# Altium PCB PCB1.PcbDoc
Units mil, origin at the board's own origin, x right, y up, seen from the top; angles counter-clockwise.
Board outline 3000 x 1000 mil, 4 copper layers (Component Side, Ground Plane, Power Plane, Solder Side), stack 33.234 mil thick; 113 components, 85 nets, 469 pads, 176 vias.
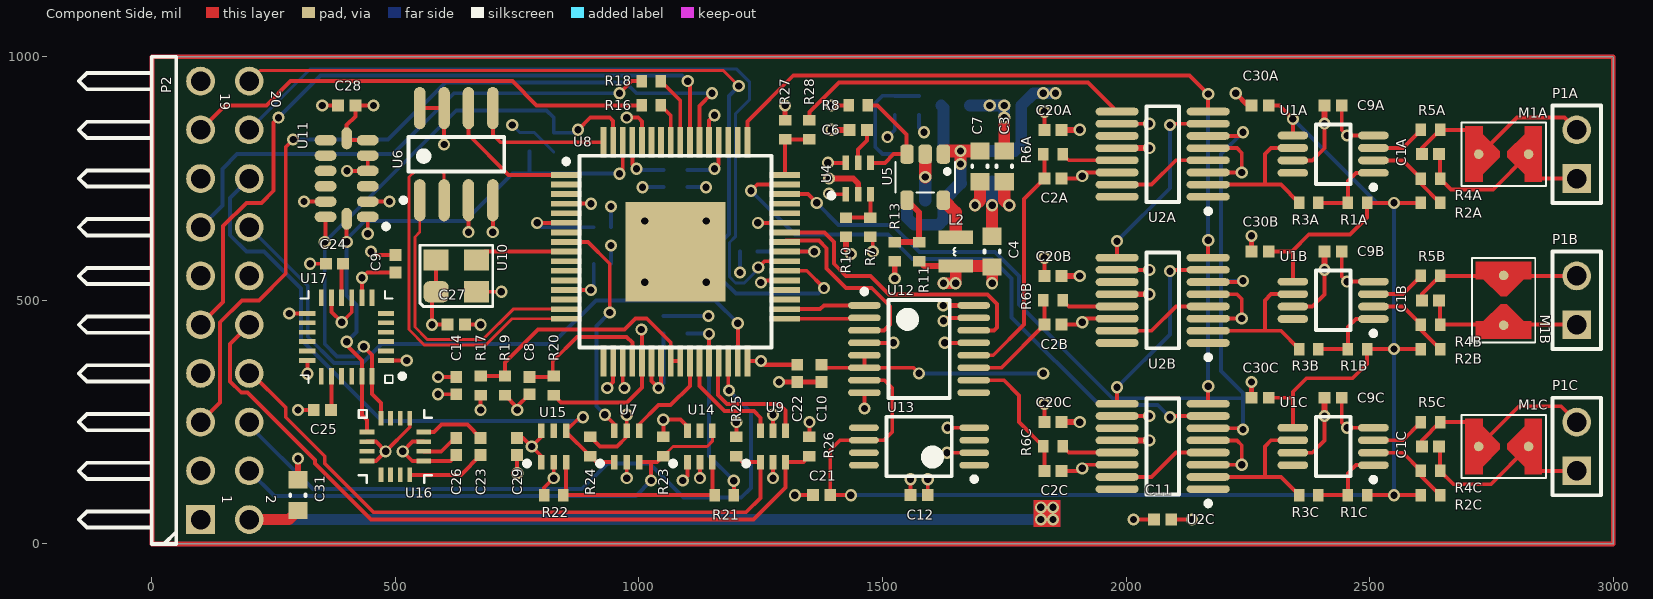
[diagram p0: Component Side view]
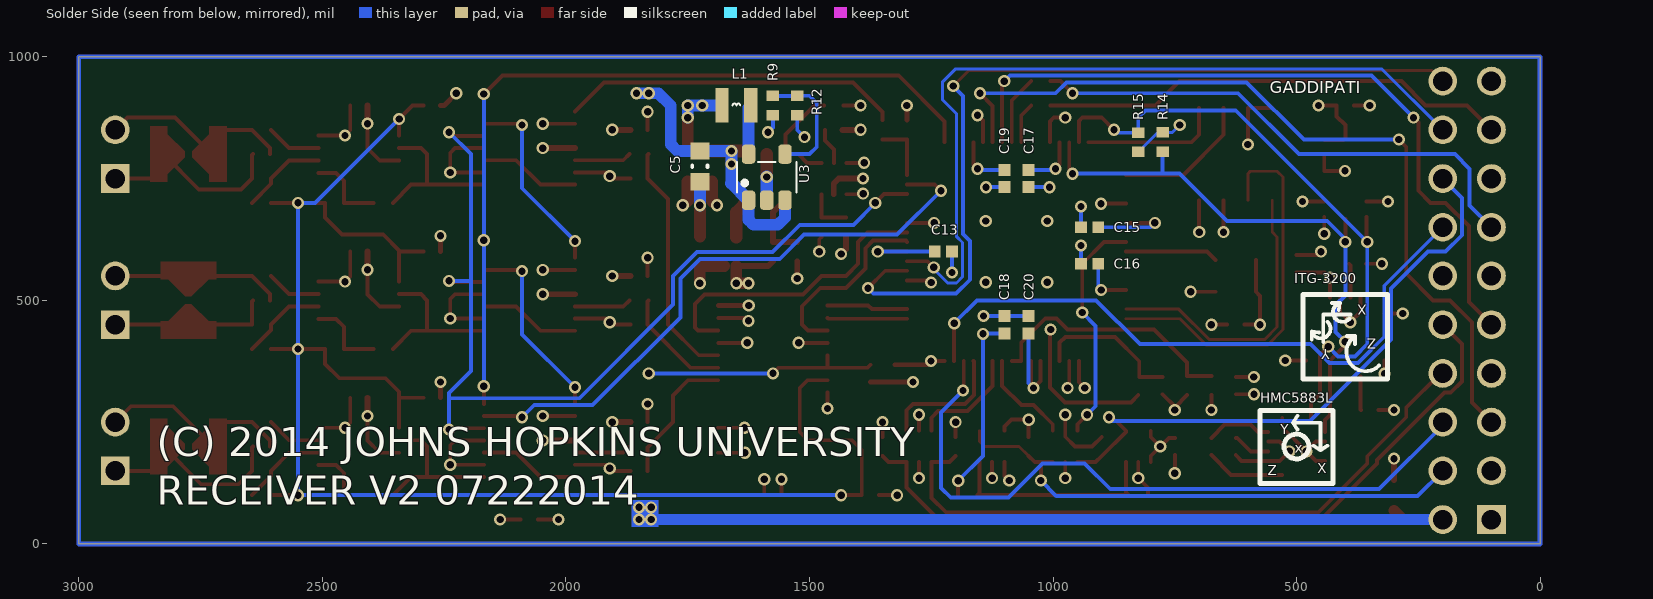
[diagram p1: Solder Side view, seen from below]
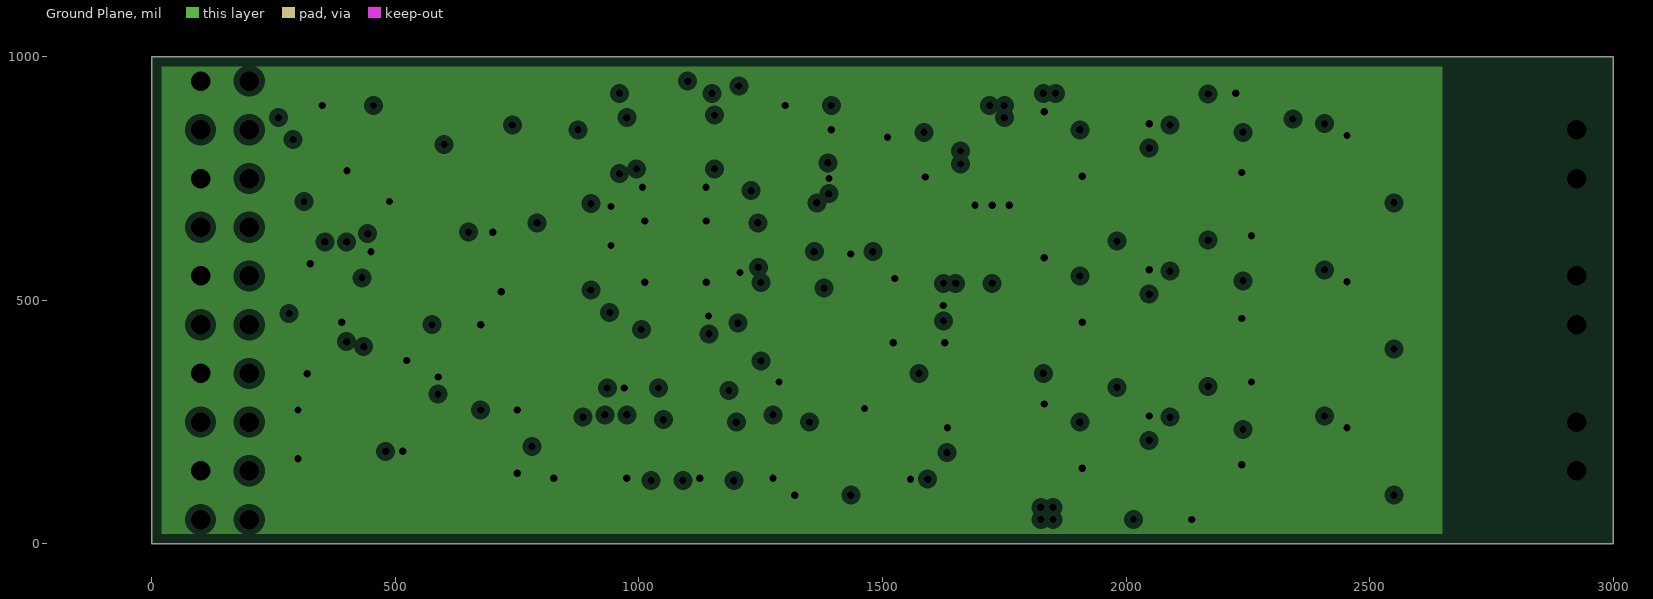
[diagram p2: Ground Plane, clearances drawn from the general rule]
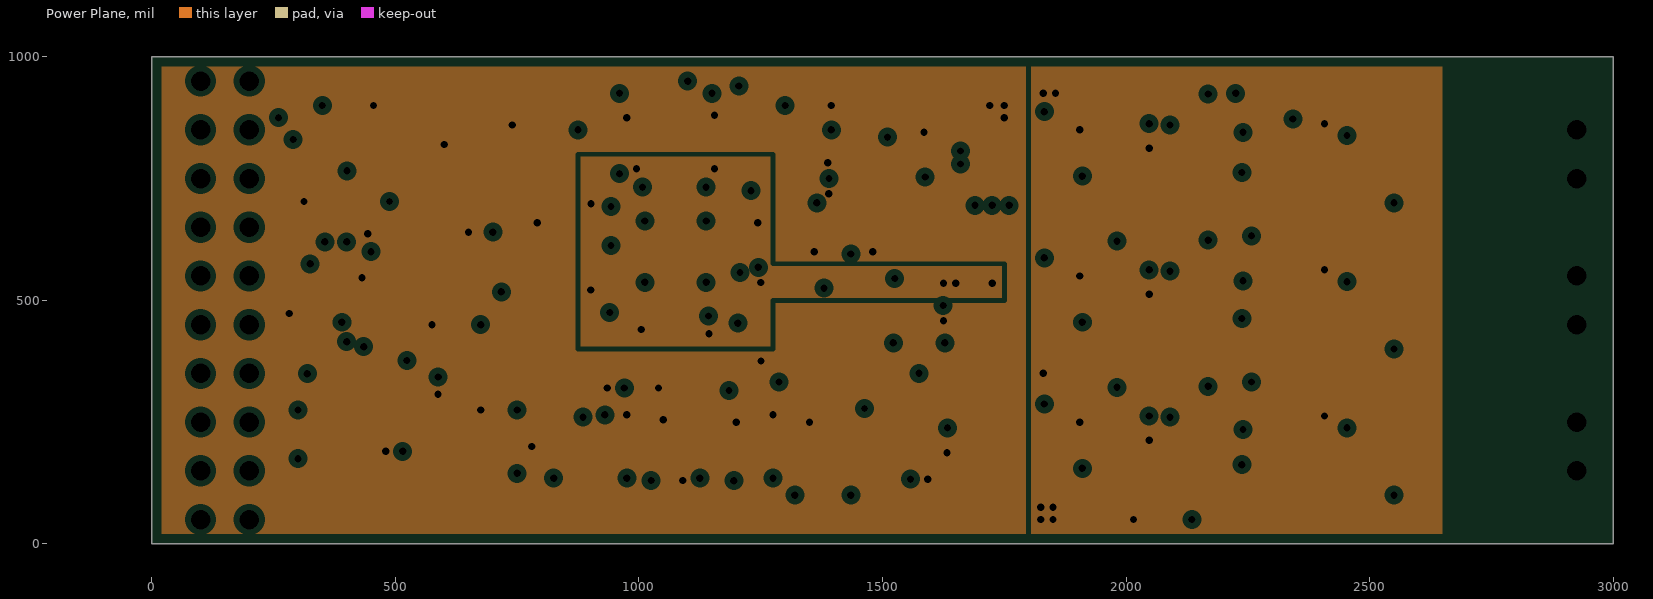
[diagram p3: Power Plane, clearances drawn from the general rule]

## Layer stack, top to bottom
Top Solder: solder mask 0.4, Solder Resist, Dk 3.5
Component Side: signal copper 1.4
Dielectric 1: core 12.6, FR-4, Dk 4.8
Ground Plane: plane copper 1.417
Dielectric 3: prepreg 5, Dk 4.2
Power Plane: plane copper 1.417
Dielectric 4: core 10, Dk 4.2
Solder Side: signal copper 1.4
Bottom Solder: solder mask 0.4, Solder Resist, Dk 3.5

## Board outline
0,0 0,1000 3000,1000 3000,0

## Design rules (kind name [scope] priority, off if disabled: settings)
Clearance [All] p1: gap=6
ComponentClearance [All] p1 off: gap=10 collisioncheckmode=3 verticalgap=10 showdistances=FALSE
HoleSize [All] p1: absolutevalues=TRUE maxlimit=100 minlimit=15 maxpercent=80.000 minpercent=20.000
HoleToHoleClearance [All] p1: gap=6 allowstackedmicrovias=TRUE
MinimumAnnularRing [All] p1: minimumring=5
MinimumSolderMaskSliver [All] p1: minsoldermaskwidth=6
PlaneClearance [All] p1: clearance=12
PlaneConnect PlaneConnect_1 [InComponentClass('TH')] p1: planeconnectstyle=Relief reliefexpansion=8 reliefentries=4 reliefconductorwidth=10 reliefairgap=10
PlaneConnect [All] p2: planeconnectstyle=Direct reliefexpansion=5 reliefentries=4 reliefconductorwidth=8 reliefairgap=8
PolygonConnect [All] p1: connectstyle=Relief reliefconductorwidth=10 reliefentries=4 polygonreliefangle="90 Angle" airgapwidth=10
RoomDefinition COIL2 [InComponentClass('COIL2')] p1: confinementstyle=ConfineIn formatcopy=TRUE lockcomponents=FALSE outline 1775,50 3025,50 3025,350 1775,350
RoomDefinition COIL1 [InComponentClass('COIL1')] p2: confinementstyle=ConfineIn formatcopy=TRUE lockcomponents=FALSE outline 1775,350 3025,350 3025,650 1775,650
RoomDefinition COIL0 [InComponentClass('COIL0')] p3: confinementstyle=ConfineIn formatcopy=TRUE lockcomponents=FALSE outline 1775,650 3025,650 3025,950 1775,950
RoutingVias [All] p1: holewidth=15 width=25 viastyle="Through Hole" minholewidth=15 minwidth=25 maxholewidth=40 maxwidth=50
SilkToSilkClearance [All] p1 off: silktosilkclearance=10
SilkToSolderMaskClearance [IsPad] p1: minsilkscreentomaskgap=6 clearancetoexposedcopper=TRUE
SolderMaskExpansion [All] p1: expansion=3
Width [All] p1: maxlimit=40 minlimit=6 preferedwidth=8
22 further rules are at their usual default settings.

## Classes and differential pairs
component class Top: R27 R28
component class COIL0: C1A C2A C9A C20A C30A M1A P1A R1A R2A R3A R4A R5A R6A U1A U2A
component class COIL1: C1B C2B C9B C20B C30B M1B P1B R1B R2B R3B R4B R5B R6B U1B U2B
component class COIL2: C1C C2C C9C C20C C30C M1C P1C R1C R2C R3C R4C R5C R6C U1C U2C
component class CORE: C3 C4 C5 C6 C7 C8 C9 C10 C11 C12 C13 C14 C15 C16 C17 C18 C19 C20 C21 C22 C31 L1 L2 P2 R7 R8 R9 R10 R11 R12 R13 R14 R15 R16 R17 R18 R19 R20 R21 R22 R23 R24 R25 R26 U3 U4 U5 U6 U7 U8 U9 U10 U12 U13 U14 U15
component class IMU: C23 C24 C25 C26 C27 C28 C29 U11 U16 U17
net class XLB: XLBR0 XLBR1 XLBT0 XLBT1
channel class Coils: COIL0 COIL1 COIL2
component class TH: P1A P1B P1C P2

## Components (designator, comment, footprint, x,y, rotation, side; value= is the part's Value field where it differs from the comment)
C1A "CAP 25V 0402(1005)" CAPC0402(1005)60_N 2625,800 r180 top (schematic designator C1)
C1B "CAP 25V 0402(1005)" CAPC0402(1005)60_N 2625,500 r180 top (schematic designator C1)
C1C "CAP 25V 0402(1005)" CAPC0402(1005)60_N 2625,200 r180 top (schematic designator C1)
C2A "CAP 100pF 25V 0402(1005)" CAPC0402(1005)60_N 1850,750 r180 top (schematic designator C2)
C2B "CAP 100pF 25V 0402(1005)" CAPC0402(1005)60_N 1850,450 r180 top (schematic designator C2)
C2C "CAP 100pF 25V 0402(1005)" CAPC0402(1005)60_N 1850,150 r180 top (schematic designator C2)
C3 "CAP 10uF 6.3V 0603(1608)" CAPC0603(1608)100_N 1750,775 r90 top
C4 "CAP 10uF 6.3V 0603(1608)" CAPC0603(1608)100_N 1725,600 r270 top
C5 "CAP 10uF 6.3V 0603(1608)" CAPC0603(1608)100_N 1725,775 r270 bottom
C6 "CAP 10nF 10V 0402(1005)" CAPC0402(1005)60_N 1450,850 r0 top
C7 "CAP 10uF 6.3V 0603(1608)" CAPC0603(1608)100_N 1700,775 r270 top
C8 "CAP 1uF 16V 0402(1005)" CAPC0402(1005)60_N 775,325 r270 top
C9 "CAP 100nF 25V 0402(1005)" CAPC0402(1005)60_N 500,575 r270 top
C9A "CAP 100nF 25V 0402(1005)" CAPC0402(1005)60_N 2425,900 r180 top (schematic designator C9)
C9B "CAP 100nF 25V 0402(1005)" CAPC0402(1005)60_N 2425,600 r180 top (schematic designator C9)
C9C "CAP 100nF 25V 0402(1005)" CAPC0402(1005)60_N 2425,300 r180 top (schematic designator C9)
C10 "CAP 100nF 25V 0402(1005)" CAPC0402(1005)60_N 1375,350 r90 top
C11 "CAP 100nF 25V 0402(1005)" CAPC0402(1005)60_N 2075,50 r180 top
C12 "CAP 1uF 16V 0402(1005)" CAPC0402(1005)60_N 1575,100 r0 top
C13 "CAP 1uF 16V 0402(1005)" CAPC0402(1005)60_N 1225,600 r0 bottom
C14 "CAP 100nF 25V 0402(1005)" CAPC0402(1005)60_N 625,325 r270 top
C15 "CAP 100nF 25V 0402(1005)" CAPC0402(1005)60_N 925,650 r180 bottom
C16 "CAP 100nF 25V 0402(1005)" CAPC0402(1005)60_N 925,575 r180 bottom
C17 "CAP 100nF 25V 0402(1005)" CAPC0402(1005)60_N 1050,750 r90 bottom
C18 "CAP 1uF 16V 0402(1005)" CAPC0402(1005)60_N 1100,450 r270 bottom
C19 "CAP 1uF 16V 0402(1005)" CAPC0402(1005)60_N 1100,750 r90 bottom
C20 "CAP 100nF 25V 0402(1005)" CAPC0402(1005)60_N 1050,450 r270 bottom
C20A "CAP 100nF 25V 0402(1005)" CAPC0402(1005)60_N 1850,850 r0 top (schematic designator C20)
C20B "CAP 100nF 25V 0402(1005)" CAPC0402(1005)60_N 1850,550 r0 top (schematic designator C20)
C20C "CAP 100nF 25V 0402(1005)" CAPC0402(1005)60_N 1850,250 r0 top (schematic designator C20)
C21 "CAP 100nF 25V 0402(1005)" CAPC0402(1005)60_N 1375,100 r0 top
C22 "CAP 1uF 16V 0402(1005)" CAPC0402(1005)60_N 1325,350 r90 top
C23 "CAP 220nF 25V 0402(1005)" CAPC0402(1005)60_N 675,200 r270 top
C24 "CAP 100nF 25V 0402(1005)" CAPC0402(1005)60_N 375,575 r0 top
C25 "CAP 2.2nF 25V 0402(1005)" CAPC0402(1005)60_N 350,275 r0 top
C26 "CAP 4.7uF 6.3V 0402(1005)" CAPC0402(1005)60_N 625,200 r90 top
C27 "CAP 100nF 25V 0402(1005)" CAPC0402(1005)60_N 625,450 r180 top
C28 "CAP 100nF 25V 0402(1005)" CAPC0402(1005)60_N 400,900 r0 top
C29 "CAP 100nF 25V 0402(1005)" CAPC0402(1005)60_N 750,200 r90 top
C30A "CAP 100nF 25V 0402(1005)" CAPC0402(1005)60_N 2275,900 r0 top (schematic designator C30)
C30B "CAP 100nF 25V 0402(1005)" CAPC0402(1005)60_N 2275,600 r0 top (schematic designator C30)
C30C "CAP 100nF 25V 0402(1005)" CAPC0402(1005)60_N 2275,300 r0 top (schematic designator C30)
C31 "CAP 10uF 6.3V 0603(1608)" CAPC0603(1608)100_N 300,100 r90 top
L1 "2u2H" "2016 Inductor" 1650,900 r0 bottom
L2 "2u2H" "2016 Inductor" 1650,600 r270 top
M1A "Multi Footprint" MULTI 2775,800 r270 top (schematic designator M1)
M1B "Multi Footprint" MULTI 2775,500 r180 top (schematic designator M1)
M1C "Multi Footprint" MULTI 2775,200 r270 top (schematic designator M1)
P1A "IN" HDR1X2 2925,750 r90 top (schematic designator P1)
P1B "IN" HDR1X2 2925,450 r90 top (schematic designator P1)
P1C "IN" HDR1X2 2925,150 r90 top (schematic designator P1)
P2 "Header 10X2H" HDR2X10H 100,50 r90 top
R1A "220R 1% 0402(1005)" RESC0402(1005)_N 2475,700 r0 top (schematic designator R1)
R1B "220R 1% 0402(1005)" RESC0402(1005)_N 2475,400 r0 top (schematic designator R1)
R1C "220R 1% 0402(1005)" RESC0402(1005)_N 2475,100 r0 top (schematic designator R1)
R2A "10K 1% 0402(1005)" RESC0402(1005)_N 2625,700 r0 top (schematic designator R2)
R2B "10K 1% 0402(1005)" RESC0402(1005)_N 2625,400 r0 top (schematic designator R2)
R2C "10K 1% 0402(1005)" RESC0402(1005)_N 2625,100 r0 top (schematic designator R2)
R3A "2K 1% 0402(1005)" RESC0402(1005)_N 2375,700 r180 top (schematic designator R3)
R3B "2K 1% 0402(1005)" RESC0402(1005)_N 2375,400 r180 top (schematic designator R3)
R3C "2K 1% 0402(1005)" RESC0402(1005)_N 2375,100 r180 top (schematic designator R3)
R4A "10K 1% 0402(1005)" RESC0402(1005)_N 2625,750 r180 top (schematic designator R4)
R4B "10K 1% 0402(1005)" RESC0402(1005)_N 2625,450 r180 top (schematic designator R4)
R4C "10K 1% 0402(1005)" RESC0402(1005)_N 2625,150 r180 top (schematic designator R4)
R5A "10K 1% 0402(1005)" RESC0402(1005)_N 2625,850 r180 top (schematic designator R5)
R5B "10K 1% 0402(1005)" RESC0402(1005)_N 2625,550 r180 top (schematic designator R5)
R5C "10K 1% 0402(1005)" RESC0402(1005)_N 2625,250 r180 top (schematic designator R5)
R6A "10K 1% 0402(1005)" RESC0402(1005)_N 1850,800 r0 top (schematic designator R6)
R6B "10K 1% 0402(1005)" RESC0402(1005)_N 1850,500 r0 top (schematic designator R6)
R6C "10K 1% 0402(1005)" RESC0402(1005)_N 1850,200 r0 top (schematic designator R6)
R7 "36K 1% 0402(1005)" RESC0402(1005)_N 1475,650 r270 top
R8 "10K 1% 0402(1005)" RESC0402(1005)_N 1450,900 r180 top
R9 "68K 1% 0402(1005)" RESC0402(1005)_N 1575,900 r270 bottom
R10 "10K 1% 0402(1005)" RESC0402(1005)_N 1425,650 r90 top
R11 "68K 1% 0402(1005)" RESC0402(1005)_N 1575,600 r270 top
R12 "15K 5% 0402(1005)" RESC0402(1005)_N 1525,900 r90 bottom
R13 "100K 1% 0402(1005)" RESC0402(1005)_N 1525,600 r90 top
R14 "10K 1% 0402(1005)" RESC0402(1005)_N 775,825 r90 bottom
R15 "10K 1% 0402(1005)" RESC0402(1005)_N 825,824.41 r270 bottom
R16 "33R 5% 0402(1005)" RESC0402(1005)_N 1025,900 r180 top
R17 "10K 1% 0402(1005)" RESC0402(1005)_N 675,325 r270 top
R18 "33R 5% 0402(1005)" RESC0402(1005)_N 1025,950 r180 top
R19 "Jumper 0402(1005)" RESC0402(1005)_N 725,325 r90 top
R20 "4R7 5% 0402(1005)" RESC0402(1005)_N 825,325 r90 top
R21 "15K 1% 0402(1005)" RESC0402(1005)_N 1175,100 r0 top
R22 "36K 1% 0402(1005)" RESC0402(1005)_N 825,100 r0 top
R23 "10K 1% 0402(1005)" RESC0402(1005)_N 1050,200 r90 top
R24 "10K 1% 0402(1005)" RESC0402(1005)_N 900,200 r90 top
R25 "10K 1% 0402(1005)" RESC0402(1005)_N 1200,200 r90 top
R26 "10K 1% 0402(1005)" RESC0402(1005)_N 1350,200 r90 top
R27 "10K 1% 0402(1005)" RESC0402(1005)_N 1300,850 r270 top
R28 "5K6 5% 0402(1005)" RESC0402(1005)_N 1350,850 r90 top
U1A "INA332AIDGKT" TI-DGK8_N 2425,800 r180 top (schematic designator U1)
U1B "INA332AIDGKT" TI-DGK8_N 2425,500 r180 top (schematic designator U1)
U1C "INA332AIDGKT" TI-DGK8_N 2425,200 r180 top (schematic designator U1)
U2A "LTC6912CGN-1#PBF" LT-GN-16_N 2075,800 r180 top (schematic designator U2)
U2B "LTC6912CGN-1#PBF" LT-GN-16_N 2075,500 r180 top (schematic designator U2)
U2C "LTC6912CGN-1#PBF" LT-GN-16_N 2075,200 r180 top (schematic designator U2)
U3 "NCP1521B" TSOP5 1625,705.51 r90 bottom
U4 "ADM1085AKSZ-REEL" KS_6 1450,750 r90 top
U5 "NCP1521B" TSOP5 1625,800 r270 top
U6 "W25X10" SO8_N 625,800 r90 top
U7 "NC7WZ17" KS_6 975,200 r90 top
U8 "XMOS-XS1-LX-64-LQFP-64" XMOS-LQFP-64_V_MOD 1075,600 r0 top
U9 "NC7WZ17" KS_6 1275,200 r90 top
U10 "ASE-20.000MHZ-LC-T" "4-SMD (3.2 x 2.5mm)" 625,550 r0 top
U11 "ADXL345BCCZ" ADI-CC-14-1_V 400,750 r180 top
U12 "AD7924BRUZ" RU-16_N 1575,400 r0 top
U13 "ADR291GRUZ" ADI-RU-8_N 1575,200 r180 top
U14 "ADM1085AKSZ-REEL" KS_6 1125,200 r90 top
U15 "ADM1085AKSZ-REEL" KS_6 825,200 r90 top
U16 "HMC5883L" HMC5883L 500,200 r0 top
U17 "ITG-3200" ITG-3200 400,425 r180 top

## Footprints (in the part's own frame and the unit in brackets; to place one, negate y for a bottom-side part, rotate by r counter-clockwise, add the part's x,y. Pads: shape width x height; smd on the part's side, far side on the other; paste and mask are expansions set on the pad)
"4-SMD (3.2 x 2.5mm)" [mm] "ASE Oscillator"
  rrect50% 1.3x1.1 smd: 1(-1.05,-0.825)
  rect 1.3x1.1 smd: 2(1.05,-0.825) 3(1.05,0.825) 4(-1.05,0.825)
  silkscreen extent -1.9,-1.6 1.9,1.6, body extent -1.6,-1.3 1.6,1.3, height 1.2
"2016 Inductor" [mm]
  rect 0.7x1.8 smd: 1(-0.75,0) 2(0.75,0)
  silkscreen extent -0.2,-0.1 0.2,0, body extent -0.9,-0.8 0.9,0.8, height 1.5
ADI-CC-14-1_V [mm] "QFN, 14-Leads, Body 5x3mm, Pitch 0.8mm"
  oval 1.145x0.55 smd: 1(-1.098,2) 2(-1.098,1.2) 3(-1.098,0.4) 4(-1.098,-0.4) 5(-1.098,-1.2) 6(-1.098,-2) 8(1.097,-2) 9(1.097,-1.2) 10(1.097,-0.4) 11(1.097,0.4) 12(1.097,1.2) 13(1.097,2)
  oval 0.55x1.145 smd: 7(0,-2.097) 14(0,2.098)
  silkscreen extent -2.18,2.38 -1.93,2.62, body extent -1.5,-2.5 1.5,2.5, height 1
ADI-RU-8_N [mm] "SOP, 8-Leads, Body 4.4x3mm, Pitch 0.65mm, IPC Medium Density"
  oval 1.55x0.35 smd: 1(-2.875,0.975) 2(-2.875,0.325) 3(-2.875,-0.325) 4(-2.875,-0.975) 5(2.875,-0.975) 6(2.875,-0.325) 7(2.875,0.325) 8(2.875,0.975)
  silkscreen extent -3,-1.55 1.7,1.82, body extent -2.25,-1.55 2.25,1.55, height 1.2
CAPC0402(1005)60_N [mm] "Chip Capacitor, Body 1.0x0.5mm, Height 0.6mm, IPC Medium Density"
  rect 0.62x0.62 smd: 1(-0.45,0) 2(0.45,0)
  body extent -0.55,-0.3 0.55,0.3, height 0.6
CAPC0603(1608)100_N [mm] "Chip Capacitor, Body 1.6x0.8mm, Height 1.0mm, IPC Medium Density"
  rect 0.9x1 smd: 1(-0.8,0) 2(0.8,0)
  silkscreen extent -0.05,-0.4 0.05,0.4, body extent -0.87,-0.48 0.88,0.47, height 1
HDR1X2 [mm] "Connector; Header; 2 Position"
  rect 1.5x1.5 hole 1.016: 1(0,0)
  round 1.5 hole 1.016: 2(2.54,0)
  silkscreen extent -1.27,-1.27 3.81,1.27
HDR2X10H [mm] "Connector; Header; 10x2 Position; Right Angle"
  rect 1.5x1.5 hole 1.016: 1(0,0)
  round 1.5 hole 1.016: 2(0,-2.54) 3(2.54,0) 4(2.54,-2.54) 5(5.08,0) 6(5.08,-2.54) 7(7.62,0) 8(7.62,-2.54) 9(10.16,0) 10(10.16,-2.54) 11(12.7,0) 12(12.7,-2.54) 13(15.24,0) 14(15.24,-2.54) 15(17.78,0) 16(17.78,-2.54) 17(20.32,0) 18(20.32,-2.54) 19(22.86,0) 20(22.86,-2.54)
  silkscreen extent -1.27,1.27 24.13,6.35
HMC5883L [mm]
  rect 0.762x0.25 smd mask+0.025: 1(-1.478,0.75) 2(-1.478,0.25) 3(-1.478,-0.25) 4(-1.478,-0.75) 9(1.478,-0.75) 10(1.478,-0.25) 11(1.478,0.25) 12(1.478,0.75)
  rect 0.25x0.762 smd mask+0.025: 5(-0.75,-1.478) 6(-0.25,-1.478) 7(0.25,-1.478) 8(0.75,-1.478) 13(0.75,1.478) 14(0.25,1.478) 15(-0.25,1.478) 16(-0.75,1.478)
  silkscreen extent -1.9,-1.9 1.9,1.9, body extent -1.5,-1.5 1.5,1.5, height 1.1
ITG-3200 [mm]
  rect 0.85x0.25 smd mask+0.025: 1(-2.05,1.229) 2(-2.05,0.739) 3(-2.05,0.249) 4(-2.05,-0.241) 5(-2.05,-0.731) 6(-2.05,-1.221) 13(2.05,-1.221) 14(2.05,-0.731) 15(2.05,-0.241) 16(2.05,0.249) 17(2.05,0.739) 18(2.05,1.229)
  rect 0.25x0.85 smd mask+0.025: 7(-1.325,-2.046) 8(-0.795,-2.046) 9(-0.265,-2.046) 10(0.265,-2.046) 11(0.795,-2.046) 12(1.325,-2.046) 19(1.324,2.054) 20(0.794,2.054) 21(0.264,2.054) 22(-0.265,2.054) 23(-0.795,2.054) 24(-1.325,2.054)
  silkscreen extent -3.02,-2.4 2.4,2.4, body extent -2,-2 2,2, height 1.05
KS_6 [mm]
  rect 0.75x0.356 smd: 1(-0.819,0.65) 2(-0.819,0) 3(-0.819,-0.65) 4(0.819,-0.65) 5(0.819,0) 6(0.819,0.65)
  silkscreen extent -1.02,1.27 -0.76,1.52, body extent -0.89,-1.02 0.89,1.02, height 1
LT-GN-16_N [mm] "SOP, 16-Leads, Body 4.9x3.9mm, Pitch 0.635mm, IPC Medium Density"
  oval 2.25x0.4 smd: 1(-2.375,2.222) 2(-2.375,1.587) 3(-2.375,0.952) 4(-2.375,0.317) 5(-2.375,-0.318) 6(-2.375,-0.953) 7(-2.375,-1.588) 8(-2.375,-2.223) 9(2.375,-2.222) 10(2.375,-1.587) 11(2.375,-0.952) 12(2.375,-0.317) 13(2.375,0.318) 14(2.375,0.953) 15(2.375,1.588) 16(2.375,2.223)
  silkscreen extent -2.5,-2.5 0.85,3.1, body extent -2,-2.5 2,2.5, height 1.75
MULTI [mm]
  round 0.5 smd paste-0.25: 1(0,1.3) 2(0,-1.3)
  Component Side region: 0.15,0.2 1.05,1.1 1.45,1.1 1.45,2 -1.45,2 -1.45,1.1 -1.05,1.1 -0.15,0.2
  Component Side region: -0.15,-0.2 -1.05,-1.1 -1.45,-1.1 -1.45,-2 1.45,-2 1.45,-1.1 1.05,-1.1 0.15,-0.2
  silkscreen extent -1.65,-2.2 1.65,2.2
RESC0402(1005)_N [mm] "Chip Resistor, Body 1.0x0.5mm, IPC Medium Density"
  rect 0.55x0.65 smd: 1(-0.5,0) 2(0.5,0)
  body extent -0.52,-0.27 0.53,0.28, height 0.4
RU-16_N [mm] "TSOP, 16-Leads, Body 5x4.4mm, Pitch 0.65mm, IPC Medium Density"
  oval 1.7x0.35 smd: 1(-2.85,2.275) 2(-2.85,1.625) 3(-2.85,0.975) 4(-2.85,0.325) 5(-2.85,-0.325) 6(-2.85,-0.975) 7(-2.85,-1.625) 8(-2.85,-2.275) 9(2.85,-2.275) 10(2.85,-1.625) 11(2.85,-0.975) 12(2.85,-0.325) 13(2.85,0.325) 14(2.85,0.975) 15(2.85,1.625) 16(2.85,2.275)
  silkscreen extent -2.97,-2.55 1.6,3.12, body extent -2.25,-2.55 2.25,2.55, height 1.2
SO8_N [mm] "SOIC, 8-Leads, Body 4.9x3.9mm, Pitch 1.27mm, IPC Medium Density"
  oval 2.2x0.6 smd: 1(-2.4,1.905) 2(-2.4,0.635) 3(-2.4,-0.635) 4(-2.4,-1.905) 5(2.4,-1.905) 6(2.4,-0.635) 7(2.4,0.635) 8(2.4,1.905)
  silkscreen extent -2.52,-2.5 0.9,2.88, body extent -2,-2.5 2,2.5, height 1.75
TI-DGK8_N [mm] "SOP, 8-Leads, Body 3.1x3.1mm, Pitch 0.65mm, IPC Medium Density"
  oval 1.6x0.4 smd: 1(-2.1,0.975) 2(-2.1,0.325) 3(-2.1,-0.325) 4(-2.1,-0.975) 5(2.1,-0.975) 6(2.1,-0.325) 7(2.1,0.325) 8(2.1,0.975)
  silkscreen extent -2.23,-1.55 0.9,1.85, body extent -1.55,-1.55 1.55,1.55, height 1.1
TSOP5 [mm]
  rrect50% 1x0.7 smd: 1(0,0) 2(0,-0.95) 3(0,-1.9) 4(2.4,-1.9) 5(2.4,0)
  silkscreen extent 0.4,-2.5 2,0.6, body extent 0.35,-2.55 2.05,0.65, height 1
XMOS-LQFP-64_V_MOD [mm] "LQFP, 64-Leads, Body 10x10mm, Pitch 0.5mm, Thermal Pad 5.2x5.2mm"
  rect 1.6x0.3 smd: 1(-5.7,4) 2(-5.7,3.5) 3(-5.7,3) 4(-5.7,2.5) 5(-5.7,2) 6(-5.7,1.5) 7(-5.7,1) 8(-5.7,0.5) 9(-5.7,0) 10(-5.7,-0.5) 11(-5.7,-1) 12(-5.7,-1.5) 13(-5.7,-2) 14(-5.7,-2.5) 15(-5.7,-3) 16(-5.7,-3.5) 33(5.7,-3.5) 34(5.7,-3) 35(5.7,-2.5) 36(5.7,-2) 37(5.7,-1.5) 38(5.7,-1) 39(5.7,-0.5) 40(5.7,0) 41(5.7,0.5) 42(5.7,1) 43(5.7,1.5) 44(5.7,2) 45(5.7,2.5) 46(5.7,3) 47(5.7,3.5) 48(5.7,4)
  rect 0.3x1.6 smd: 17(-3.75,-5.7) 18(-3.25,-5.7) 19(-2.75,-5.7) 20(-2.25,-5.7) 21(-1.75,-5.7) 22(-1.25,-5.7) 23(-0.75,-5.7) 24(-0.25,-5.7) 25(0.25,-5.7) 26(0.75,-5.7) 27(1.25,-5.7) 28(1.75,-5.7) 29(2.25,-5.7) 30(2.75,-5.7) 31(3.25,-5.7) 32(3.75,-5.7) 49(3.75,5.7) 50(3.25,5.7) 51(2.75,5.7) 52(2.25,5.7) 53(1.75,5.7) 54(1.25,5.7) 55(0.75,5.7) 56(0.25,5.7) 57(-0.25,5.7) 58(-0.75,5.7) 59(-1.25,5.7) 60(-1.75,5.7) 61(-2.25,5.7) 62(-2.75,5.7) 63(-3.25,5.7) 64(-3.75,5.7)
  rect 5.2x5.2 smd paste-2.6: 65(0,0)
  silkscreen extent -5.82,-5 5,5, body extent -5,-5 5,5, height 1.6

## Part data
C1A C1B C1C: library part CMP-1034-00714-1, "CAP 25V ±1% 0402 (1005 Metric) Thickness 0.6mm SMD"
C2A C2B C2C: library part CMP-1034-01239-1, "CAP 100pF 25V ±1% 0402 (1005 Metric) Thickness 0.6mm SMD"
C3 C4 C5 C7 C31: library part CMP-1035-02797-1, "CAP 10uF 6.3V ±20% 0603 (1608 Metric) Thickness 1mm SMD"
C6: library part CMP-1034-01870-1, "CAP 10nF 10V ±5% 0402 (1005 Metric) Thickness 0.6mm SMD"
C8 C12 C13 C18 C19 C22: library part CMP-1034-02120-1, "CAP 1uF 16V ±20% 0402 (1005 Metric) Thickness 0.6mm SMD"
C9 C9A C9B C9C C10 C11 C14 C15 C16 C17 C20 C20A C20B C20C C21 C24 C27 C28 C29 C30A C30B C30C: library part CMP-1034-02073-1, "CAP 100nF 25V ±20% 0402 (1005 Metric) Thickness 0.6mm SMD"
C23: library part CMP-1034-02093-1, "CAP 220nF 25V ±20% 0402 (1005 Metric) Thickness 0.6mm SMD"
C25: library part CMP-1034-01740-1, "CAP 2.2nF 25V ±20% 0402 (1005 Metric) Thickness 0.6mm SMD"
C26: library part CMP-1034-02137-1, "CAP 4.7uF 6.3V ±20% 0402 (1005 Metric) Thickness 0.6mm SMD"
L1 L2: library part "2016 Inductor"
M1A M1B M1C: library part Multi
P1A P1B P1C: library part "Header 2", "Header, 2-Pin"
P2: "Header, 10-Pin, Dual row, Right Angle"
R1A R1B R1C: library part CMP-1011-00433-1, "220R 0.063W 1% 0402 (1005 Metric)  SMD"
R2A R2B R2C R4A R4B R4C R5A R5B R5C R6A R6B R6C R8 R10 R14 R15 R17 R23 R24 R25 R26 R27: library part CMP-1011-00623-1, "10K 0.063W 1% 0402 (1005 Metric)  SMD"
R3A R3B R3C: library part CMP-1011-00542-1, "2K 0.063W 1% 0402 (1005 Metric)  SMD"
R7 R22: library part CMP-1011-00685-1, "36K 0.063W 1% 0402 (1005 Metric)  SMD"
R9 R11: library part CMP-1011-00717-1, "68K 0.063W 1% 0402 (1005 Metric)  SMD"
R12: library part CMP-1011-00102-1, "15K 0.063W 5% 0402 (1005 Metric)  SMD"
R13: library part CMP-1011-00736-1, "100K 0.063W 1% 0402 (1005 Metric)  SMD"
R16 R18: library part CMP-1011-00038-1, "33R 0.063W 5% 0402 (1005 Metric)  SMD"
R19: library part CMP-1011-00001-1, "Jumper 0402 (1005 Metric)"
R20: library part CMP-1011-00018-1, "4R7 0.063W 5% 0402 (1005 Metric)  SMD"
R21: library part CMP-1011-00641-1, "15K 0.063W 1% 0402 (1005 Metric)  SMD"
R28: library part CMP-1011-00092-1, "5K6 0.063W 5% 0402 (1005 Metric)  SMD"
U1A U1B U1C: library part CMP-0944-00079-1, "Low-Power, Single Supply, CMOS, Low Cost, Instrumentation Amplifier, -55 to 125 degC, 8-pin SOP (DGK8), Green (RoHS & no Sb/Br)"
U2A U2B U2C: library part CMP-0359-00187-2, "Dual Channel, Dual Programmable Gain Amplifier with Serial Digital Interface, 30 MHz Typical GBW, 16 V/us Typical SR, 2.7 to 10.5 V, 16-Pin SOP (GN-16), Commercial, Pb-Free"
U4 U14 U15: "Imported"
U11: library part CMP-0885-00027-1, "3-Axis, +/-2 g / +/-4 g / +/-8 g / +/-16 g Digital Accelerometer with Digital Output, 1.6 KHz BW, Industrial, 14-pin LGA, Tray"
U12: library part CMP-0313-02203-2, "Quad 12-Bit Analog-to-Digital Converter with Serial, SPI Interface and Sequencer, 1MSPS, 0 to +70 degC, RU-16, Pb-Free, Tube"
U13: library part CMP-0784-00483-1, "Low Noise Micropower Precision Voltage Reference, 2.5 V Output, 2.8 to 15 V Supply, Industrial, 8-pin SOP (RU-8), Tube"

## Via types
v1: diameter 25, hole 15, Component Side to Solder Side, tented both sides, 172 vias
v2: diameter 25, hole 15, Component Side to Solder Side, tented bottom, 4 vias

## Nets (pads, with @x,y where several pads share a name; then routed paths per layer and width w, separated by ;. In a path a pad name is that pad's centre, name@x,y a point inside that pad or via, vN(x,y) a via of type N, cw(c..) or ccw(c..) an arc to the next point about the centre after c; other vN are vias at no path point)
3V3: C3.2 C9.2 C12.2 C13.2 C14.2 C15.2 C20.2 C22.2 C27.2 C28.2 C29.2 L1.2 R7.2 R8.2 R9.2 R14.2 R15.2 R17.2 R23.2 R24.2 R25.2 R26.2 U4.1 U4.6 U6.3 U6.7 U6.8 U7.5 U8.6 U8.18 U8.22 U8.23 U8.32 U8.40 U8.53 U8.60 U9.5 U10.1 U10.4 U11.1 U11.6 U11.7 U11.12 U12.15 U13.2 U14.1 U14.6 U15.1 U15.6 U16.2 U16.4 U16.13 U17.8 U17.13 | length 2984.7
  Component Side w8: v1(281.91,473.09) U17.13 ; v1(312.24,702.76) U11.12 ; U17.8 v1(431.32,546.32) 442.28,557.28 C9.2 ; U16.4 460.47,170.47 v1(480,190) ; U16.2 460.16,209.84 v1(480,190) ; v1(443.21,636.79) U11.1 ; U11.6 403.84,828.74 U11.7 400,860 417.72,877.72 C28.2 v1(455,900) ; U16.13 529.53,239.53 v1(480,190) ; U6.8 U6.7 v1(600,820) ; U10.4 U10.1 575,508.86 v1(575,450) C27.2 ; v1(587.28,307.28) C14.2 ; v1(650,640) U6.3 ; v1(675,275) R17.2 ; C29.2 762.28,217.72 v1(780,200) ; v1(790.94,659.06) U8.6 ; U15.1 799.41,180.59 v1(780,200) ; U15.6 799.41,219.41 v1(780,200) ; R24.2 919.68,200 955,200 975,220 U7.5 v1(975,265) ; v1(935,320) 947.05,332.05 U8.18 ; v1(975,875) 998.57,875 1006.1,867.47 U8.60 ; U8.22 1025.79,334.21 v1(1040,320) 1045.47,325.47 U8.23 ; R23.2 v1(1050,255) 1085,255 1099.41,240.59 U14.6 ; v1(1090,130) 1099.41,139.41 U14.1 ; U8.53 1143.9,868.9 v1(1155,880) ; R25.2 v1(1200,250) ; U8.32 v1(1250.59,375.59) ; U9.5 v1(1275,265) ; U8.40 v1(1360,600) ; R26.2 v1(1350,250) ; v1(1387.75,782.25) U4.6 ; v1(1389.84,719) 1391.09,717.75 U4.1 ; v1(1395,900) R8.2 ; R7.2 1480,625.32 v1(1480,600) ; C12.2 v1(1592.72,132.72) ; v1(1625,457.8) 1631.18,463.98 U12.15 ; v1(1632.2,187.2) U13.2
  Component Side w10: v1(1250.59,375.59) 1258.46,367.72 C22.2
  Component Side w24: C3.2 v1(1750,875)
  Solder Side w6: v1(740,860) 755.31,844.69 R14.2 785.04,844.69 R15.2
  Solder Side w8: v1(790.94,659.06) 800,650 C15.2 ; v1(1040,320) 1050,330 C20.2 ; C13.2 v1(1360,600) ; R9.2 1575,855 v1(1585,845)
  Solder Side w24: L1.2 v1(1750,900) v1(1750,875)
  other v1: 1720,900
5V: C5.1 C7.1 C9A.2 C9B.2 C9C.2 C10.2 C11.2 C20A.2 C20B.2 C20C.2 C31.1 P2.2 U1A.7 U1B.7 U1C.7 U2A.12 U2B.12 U2C.12 U3.1 U3.3 U5.1 U12.5 U12.6 | length 3733.8
  Component Side w8: C10.2 1381.1,361.61 U12.6 ; U12.5 U12.6 ; v1(1575,350) 1563.39,361.61 U12.6 ; v1(2015,50) C11.2 ; U1C.7 2382.2,187.2 2407.28,212.28 v1(2407.28,262.72) ; U1B.7 2382.2,487.2 2407.28,512.28 v1(2407.28,562.72) ; U1A.7 2382.2,787.2 2407.28,812.28 v1(2407.28,862.72)
  Component Side w12: C20C.2 v1(1905,250) ; C20B.2 v1(1905,550) ; C20A.2 v1(1905,850) ; U2C.12 v1(2047.5,212.5) ; U2B.12 v1(2047.5,512.5) ; U2A.12 v1(2047.5,812.5) ; v1(2407.28,262.72) C9C.2 ; v1(2407.28,562.72) C9B.2 ; v1(2407.28,862.72) C9A.2
  Component Side w22: P2.2 281.5,50 C31.1
  Component Side w25: v1(1660,780) v1(1660,806.5)
  Component Side w26: U5.1 1631.5,806.5 v1(1660,806.5) C7.1
  Solder Side w8: v1(1575,350) v1(1830,350)
  Solder Side w22: P2.2 v1(1825,50)
  Solder Side w24: U3.3 1550.2,669.8 1565,655 1615,655 1625,665 U3.1 ; 1660,740.51 v1(1660,780) v1(1660,806.5) C5.1 1771.5,806.5 1785,820 1785,900 1810,925 v1(1830,925) v1(1855,925)
  Solder Side w26: U3.1 1660,740.51
  other v1: 1850,50 1825,75 1850,75
/RST: P2.16 R24.1 U7.1 U15.4 | length 1252.4
  Component Side w8: v1(885,260) 878.34,260 U15.4 850.59,229.72 R24.1 912.56,167.75 U7.1
  Solder Side w8: P2.16 160.47,710.47 160.47,633.63 194.1,600 230,600 306,524 306,419.4 472.9,252.5 877.5,252.5 v1(885,260)
/RSTB: U7.6 U8.8 | length 477.3
  Component Side w8: U8.8 895.31,619.69 940,575 v1(940,475) ; v1(930,265) 949.41,245.59 U7.6
  Solder Side w8: v1(930,265) 912.5,282.5 912.5,447.5 v1(940,475)
/TRST: P2.4 R23.1 U7.3 U14.4 | length 1086.5
  Component Side w6: R23.1 1069.68,200 1140,200 1150.59,210.59 U14.4
  Component Side w8: U7.3 1025,167.75 ; v1(1025,130) 1025,167.75 ; R23.1 1037.43,167.75 1025,167.75
  Solder Side w8: P2.4 251.5,98.5 993.5,98.5 v1(1025,130)
/TRSTB: U7.4 U8.26 | length 201
  Component Side w8: U7.4 1000.59,245.59 1040,285 1065,285 1104.53,324.53 U8.26
ADC_CLK: U8.34 U12.1 | length 166.6
  Component Side w8: U8.34 1371.89,481.89 1379.57,489.57 U12.1
ADC_CS: U8.41 U12.3 | length 391.9
  Component Side w8: U8.41 1302.22,622.5 1369.32,622.5 1385,606.82 1385,565 1425,525 1477.82,525 1515,487.82 1515,450 1503.39,438.39 U12.3
ADC_MISO: U8.42 U12.14 | length 621.1
  Component Side w8: U8.42 1380.63,639.37 1400,620 1400,575 1425,550 1475,550 1512.93,512.07 1715.17,512.07 1735,492.23 1735,444.21 1729.18,438.39 U12.14
ADC_MOSI: U8.33 U12.2 | length 164.1
  Component Side w8: U8.33 1461.02,462.2 U12.2
DEBUG: U8.17
FLASH_CLK: U6.6 U8.1 | length 289.3
  Component Side w8: U6.6 650,840 732.52,757.48 U8.1
FLASH_CS: U6.1 U8.15 | length 611.2
  Component Side w6: U6.1 550,640 540,630 540,445 565,420 680,420 741.89,481.89 U8.15
FLASH_DI: U6.5 U8.64 | length 288.3
  Component Side w8: U6.5 700,840 715.59,824.41 U8.64
FLASH_DO: U6.2 U8.16 | length 804.8
  Component Side w6: U6.2 600,760 595,765 540,765 528,753 528,440.03 560.03,408 684.97,408 739.18,462.2 U8.16
GND: C2A.1 C2B.1 C2C.1 C3.1 C4.1 C5.2 C6.1 C7.2 C8.2 C9.1 C9A.1 C9B.1 C9C.1 C10.1 C11.1 C12.1 C13.1 C14.1 C15.1 C16.1 C17.1 C18.1 C19.1 C20.1 C20A.1 C20B.1 C20C.1 C21.1 C22.1 C24.1 C25.1 C26.1 C27.1 C28.1 C29.1 C30A.1 C30B.1 C30C.1 C31.2 P2.3 P2.7 P2.11 P2.15 P2.19 R10.1 R12.1 R13.1 R19.1 R22.1 R27.1 U1A.4 U1B.4 U1C.4 U2A.3 U2A.5 U2A.10 U2A.14 U2B.3 U2B.5 U2B.10 U2B.14 U2C.3 U2C.5 U2C.10 U2C.14 U3.2 U4.2 U5.2 U6.4 U7.2 U8.19 U8.65 U9.2 U10.2 U11.2 U11.4 U11.5 U12.4 U12.8 U12.13 U12.16 U13.4 U14.2 U15.2 U16.9 U16.11 U17.1 U17.9 U17.11 U17.18 | length 4245.8
  Component Side w8: v1(300,275) C25.1 ; v1(319.31,349.31) U17.18 ; v1(325,575) C24.1 ; v1(350,900) C28.1 ; U17.11 368.72,476.28 v1(390,455) 410.45,475.45 U17.9 ; v1(400.75,765.75) U11.4 U11.5 ; U11.2 v1(487.76,702.76) ; v1(450,600) 457.28,592.72 C9.1 ; U17.1 v1(523.37,376.63) ; U16.11 534.84,209.84 v1(515,190) 534.53,170.47 U16.9 613.19,170.47 C26.1 ; v1(587.72,342.72) C14.1 ; C27.1 v1(675,450) ; U10.2 v1(717.48,517.52) ; v1(700,640) U6.4 ; R19.1 v1@750,280.31 ; v1(750,145) C29.1 ; v1(750,275) v1@750,280.31 ; C8.2 750,282.28 v1@750,280.31 ; R22.1 805.32,115.32 v1(825,135) U15.2 ; U8.19 966.73,323.27 v1(970,320) ; v1(975,135) U7.2 ; v1(1125,135) U14.2 ; v1(1275,135) U9.2 ; v1(1320,100) C21.1 ; v1(1462.8,277.8) U12.8 ; U12.4 v1(1522.2,412.8) ; C12.1 v1(1557.28,132.72) ; v1(1627.8,412.8) U12.13 ; v1(1633.39,238.39) U13.4 ; C20C.1 v1(1832.28,287.28) ; C20B.1 v1(1832.28,587.28) ; C20A.1 v1(1832.28,887.28) ; C2C.1 1905,150 v1(1910,155) 1917.5,162.5 U2C.14 ; C2B.1 1905,450 v1(1910,455) 1917.5,462.5 U2B.14 ; C2A.1 1905,750 v1(1910,755) 1917.5,762.5 U2A.14 ; U2C.10 v1(2047.5,262.5) ; U2B.10 v1(2047.5,562.5) ; U2A.10 v1(2047.5,862.5) ; C11.1 v1(2135,50) ; U2C.3 v1(2237.5,162.5) 2237.5,202.5 2227.5,212.5 U2C.5 ; U2B.3 v1(2237.5,462.5) 2237.5,502.5 2227.5,512.5 U2B.5 ; U2A.3 v1(2237.5,762.5) 2237.5,802.5 2227.5,812.5 U2A.5 ; C9C.1 2442.72,249.06 v1(2453.39,238.39) U1C.4 ; C9B.1 2442.72,549.06 v1(2453.39,538.39) U1B.4 ; C9A.1 2442.72,849.06 v1(2453.39,838.39) U1A.4
  Component Side w10: v1(1287.28,332.28) C22.1 C10.1 ; R27.1 v1(1300,900) ; v1(1624.57,489.57) U12.16 ; v1(2225,925) 2250,900 C30A.1 ; C30C.1 v1(2257.28,332.28) ; C30B.1 v1(2257.28,632.28)
  Component Side w12: C31.2 v1(300,175) ; v1(1390,750) 1440,750 1450,740 U4.2 ; v1(1395,850) C6.1 ; R10.1 1425,605 v1(1435,595) ; v1(1525,545) R13.1
  Component Side w25: v1(1690,695) 1700,705 C7.2 ; C4.1 v1(1725,695) ; C3.1 1750,705 v1(1760,695)
  Component Side w26: v1(1587.6,753) U5.2
  Solder Side w8: C16.1 v1(942.72,612.72) ; C15.1 v1(942.72,692.72) ; v1(1007.28,732.28) C17.1 ; C20.1 C18.1 v1(1142.72,467.72) ; C19.1 v1(1137.72,732.28) ; v1(1207.28,557.28) C13.1 ; v1(1510,835) 1525,850 R12.1
  Solder Side w25: v1(1725,695) C5.2
  Solder Side w26: U3.2 v1(1587.6,753)
  other v2: 1012.01,537.01 1137.99,537.01 1012.01,662.99 1137.99,662.99
MODE3: R17.1 R19.2 U8.24 U8.25 | length 532.9
  Component Side w8: R17.1 R19.2 725,372.34 792.66,440 970,440 992.5,462.5 1015.96,462.5 1065.16,413.31 U8.24 U8.25
NetC1A_1: C1A.1 M1A.1 P1A.1 R4A.1 | length 352.7
  Component Side w8: C1A.1 2644.68,798.03 R4A.1 2667.18,727.5 2753.68,727.5 M1A.1 ; 2844,750 P1A.1
NetC1A_2: C1A.2 M1A.2 P1A.2 R5A.1 | length 367.4
  Component Side w8: C1A.2 2607.28,812.6 R5A.1 2704,850 ; M1A.2 2727.78,800 2802.78,875 2900,875 P1A.2
NetC1B_1: C1B.1 M1B.1 P1B.1 R4B.1 | length 332.1
  Component Side w8: C1B.1 2644.68,498.03 R4B.1 2773.82,450 M1B.1 2776.18,450 P1B.1
NetC1B_2: C1B.2 M1B.2 P1B.2 R5B.1 | length 346.8
  Component Side w8: C1B.2 2607.28,512.6 R5B.1 2773.82,550 M1B.2 2776.18,550 P1B.2
NetC1C_1: C1C.1 M1C.1 P1C.1 R4C.1 | length 356.8
  Component Side w8: C1C.1 2644.68,198.03 R4C.1 2672.18,122.5 2748.68,122.5 M1C.1 ; 2844,150 P1C.1
NetC1C_2: C1C.2 M1C.2 P1C.2 R5C.1 | length 368.6
  Component Side w8: C1C.2 2607.28,212.6 R5C.1 2699,250 ; M1C.2 2806.32,282.5 2892.5,282.5 P1C.2
NetC6_2: C6.2 U4.5 | length 75.1
  Component Side w8: U4.5 1450,810 1467.72,827.72 C6.2
NetC8_1: C8.1 R20.2 U8.20 | length 307
  Component Side w8: C8.1 823.03,342.72 823.03,375 873.03,425 974.72,425 986.42,413.31 U8.20
NetC23_1: C23.1 U16.12 | length 134.5
  Component Side w8: U16.12 579.53,229.53 595,245 647.72,245 C23.1
NetC23_2: C23.2 U16.8 | length 162.2
  Component Side w8: U16.8 634.52,141.8 C23.2
NetC24_2: C24.2 U17.10 | length 70.7
  Component Side w8: U17.10 389.59,571.87 C24.2
NetC25_2: C25.2 U17.20 | length 69.6
  Component Side w8: C25.2 368.72,276 U17.20
NetC26_2: C26.2 U16.10 | length 78.3
  Component Side w8: U16.10 558.35,190 594.16,190 621.88,217.72 C26.2
NetL1_1: L1.1 U3.5 | length 101.9
  Solder Side w24: L1.1 1625,895.47 U3.5
NetL2_1: L2.1 U5.5 | length 86.3
  Component Side w26: U5.5 1650,680.51 L2.1
NetR1A_1: R1A.1 R3A.1 U1A.1 | length 165.3
  Component Side w8: R3A.1 R1A.1 2455.32,744.68 2455,745 2471.61,761.61 U1A.1
NetR1B_1: R1B.1 R3B.1 U1B.1 | length 165.3
  Component Side w8: R3B.1 R1B.1 2455.32,444.68 2455,445 2471.61,461.61 U1B.1
NetR1C_1: R1C.1 R3C.1 U1C.1 | length 165.3
  Component Side w8: R3C.1 R1C.1 2455.32,144.68 2455,145 2471.61,161.61 U1C.1
NetR2A_2: R2A.2 R4A.2 U1A.2 | length 179.4
  Component Side w8: U1A.2 2568.11,787.2 R4A.2 2605.31,739.37 R2A.2
NetR2B_2: R2B.2 R4B.2 U1B.2 | length 179.4
  Component Side w8: U1B.2 2568.11,487.2 R4B.2 2605.31,439.37 R2B.2
NetR2C_2: R2C.2 R4C.2 U1C.2 | length 179.4
  Component Side w8: U1C.2 2568.11,187.2 R4C.2 2605.31,139.37 R2C.2
NetR3A_2: R3A.2 U1A.6 U2A.2 | length 327.5
  Component Side w8: U2A.2 2285,737.5 ; U1A.6 2297.8,812.8 2285,800 2285,737.5 ; R3A.2 2317.81,737.5 2285,737.5
NetR3B_2: R3B.2 U1B.6 U2B.2 | length 327.5
  Component Side w8: U2B.2 2285,437.5 ; U1B.6 2297.8,512.8 2285,500 2285,437.5 ; R3B.2 2317.81,437.5 2285,437.5
NetR3C_2: R3C.2 U1C.6 U2C.2 | length 327.5
  Component Side w8: U2C.2 2285,137.5 ; U1C.6 2297.8,212.8 2285,200 2285,137.5 ; R3C.2 2317.81,137.5 2285,137.5
NetR5A_2: R5A.2 U1A.3 | length 113
  Component Side w8: U1A.3 2568.11,812.8 R5A.2
NetR5B_2: R5B.2 U1B.3 | length 113
  Component Side w8: U1B.3 2568.11,512.8 R5B.2
NetR5C_2: R5C.2 U1C.3 | length 113
  Component Side w8: U1C.3 2568.11,212.8 R5C.2
NetR6A_2: R6A.2 U2A.13 | length 117
  Component Side w8: R6A.2 1882.19,787.5 U2A.13
NetR6B_2: R6B.2 U2B.13 | length 117
  Component Side w8: R6B.2 1882.19,487.5 U2B.13
NetR6C_2: R6C.2 U2C.13 | length 117
  Component Side w8: R6C.2 1882.19,187.5 U2C.13
NetR7_1: R7.1 R10.2 U4.3 | length 98.3
  Component Side w8: R10.2 R7.1 1475,717.16 U4.3
NetR8_1: R8.1 U4.4 U5.3 | length 227.2
  Component Side w8: R8.1 1490,900 1549.41,840.59 1549.41,800.79 U5.3@1548.62,800 ; U4.4 1505,782.25 1522.75,800 U5.3@1548.62,800 ; U5.3 U5.3@1548.62,800
NetR9_1: R9.1 R12.2 U3.4 | length 257.8
  Solder Side w8: U3.4 1500,800 1485,815 1485,905 1500,920 1524.69,920 R12.2 R9.1
NetR11_1: R11.1 R13.2 U5.4 | length 146.1
  Component Side w12: R13.2 R11.1 1575,680.71 U5.4
NetR16_1: R16.1 U8.57 | length 84.1
  Component Side w8: R16.1 1065.16,879.53 U8.57
NetR18_1: R18.1 U8.56 | length 142.2
  Component Side w8: R18.1 1084.84,909.84 U8.56
NetR21_1: R21.1 R22.2 U14.3 U15.3 | length 450.5
  Component Side w8: U15.3 850.59,105.91 R22.2 R21.1 1150.59,104.72 U14.3
NetR28_2: R28.2 U2A.9 | length 698.6
  Component Side w8: R28.2 1350,886.82 1410.68,947.5 1921.5,947.5 U2A.9
NetU2A_4: U2A.4 U2A.15 | length 207.7
  Component Side w8: U2A.15 2052.5,737.5 2102.5,787.5 U2A.4
NetU2A_7: U2A.7 U2B.9 | length 397
  Component Side w8: U2B.9 v1(1981.5,621.5) ; v1(2090,860) 2092.5,862.5 U2A.7
  Solder Side w8: v1(1981.5,621.5) 2090,730 v1(2090,860)
NetU2B_4: U2B.4 U2B.15 | length 207.7
  Component Side w8: U2B.15 2052.5,437.5 2102.5,487.5 U2B.4
NetU2B_7: U2B.7 U2C.9 | length 397
  Component Side w8: U2C.9 v1(1981.5,321.5) ; v1(2090,560) 2092.5,562.5 U2B.7
  Solder Side w8: v1(1981.5,321.5) 2090,430 v1(2090,560)
NetU2C_4: U2C.4 U2C.15 | length 207.7
  Component Side w8: U2C.15 2052.5,137.5 2102.5,187.5 U2C.4
NetU8_9: U8.9 U10.3 | length 191.5
  Component Side w8: U10.3 683.86,600 U8.9
NetU12_9: U12.9
PGA_CLK: U2A.8 U2B.8 U2C.8 U8.49 | length 1751.6
  Component Side w8: U8.49 1222.64,867.47 1316.67,961.5 2130.51,961.5 v1(2168.5,923.5) U2A.8 ; U2C.8 v1(2168.5,323.5) ; U2B.8 v1(2168.5,623.5)
  Solder Side w8: v1(2168.5,323.5) v1(2168.5,623.5) v1(2168.5,923.5)
PGA_CS: U2A.6 U2B.6 U2C.6 U8.46 | length 2060.9
  Component Side w8: U8.46 1346.89,718.11 v1(1365,700) ; U2C.6 2237.5,237.5 v1(2240,235) ; U2B.6 2237.5,537.5 v1(2240,540) ; U2A.6 2232.5,837.5 v1(2240,845)
  Solder Side w8: v1(1365,700) 1410,655 1520,655 1576,599 1730.8,599 1780,549.8 1780,491.17 1972.18,299 2032.38,299 2239,299 2240,300 ; v1(2240,235) 2240,300 ; v1(2240,540) 2195,540 ; v1(2240,845) 2195,800 2195,540 ; 2195,540 2195,355 2240,310 2240,300
PGA_MISO: R27.2 R28.1 U8.48 | length 123.1
  Component Side w8: U8.48 1300,758.07 R27.2 R28.1
PGA_MOSI: U2C.7 U8.47 | length 1253.7
  Component Side w8: v1(1230,725) 1242.8,737.8 U8.47 ; v1(2090,260) 2092.5,262.5 U2C.7
  Solder Side w8: v1(1230,725) 1320,635 1510.95,635 1560.95,585 1725,585 1765,545 1765,465 1945,285 2038.18,285 2065,285 v1(2090,260)
RX: P2.18 U8.39 | length 1645.1
  Component Side w8: v1(1245,567.63) 1257.69,580.32 U8.39
  Solder Side w6: P2.18 324.5,974.5 1200.91,974.5 1226.5,948.91 1226.5,911.5 1197.78,882.78 1197.78,630.47 1185.78,618.47 1185.78,548.38 1198.38,535.78 1216.19,535.78 1245,564.59 v1(1245,567.63)
SCL: R14.1 U8.62 U11.14 U16.1 U17.23 | length 1205.4
  Component Side w8: v1(400,415) 400,408.18 431.32,376.86 U17.23 431.32,265 441.8,254.52 U16.1 ; v1(400,620) U11.14 ; v1(960,760) 966.73,766.73 U8.62
  Solder Side w8: v1(400,415) 420,435 420,490 400,510 v1(400,620) 400,625.4 437.1,662.5 642.5,662.5 740,760 775,760 ; R14.1 775,760 ; v1(960,760) 775,760
SDA: R15.1 U8.63 U11.13 U16.16 U17.24 | length 1322.4
  Component Side w8: v1(355,620) 356.79,621.79 U11.13 ; v1(435,405) 452.18,387.82 U17.24 452.18,307.82 470.47,289.53 U16.16 ; v1(875,850) 900,875 940,875 947.05,867.95 U8.63
  Solder Side w8: v1(435,405) 415,385 380,385 355,410 v1(355,620) 625,890 810,890 825,875 R15.1 869.09,844.09 v1(875,850)
TCK: P2.10 R26.1 U9.3 | length 1528.2
  Component Side w8: P2.10 160.47,410.47 160.47,333.63 183.63,310.47 196.35,310.47 335,171.82 335,165.2 450.2,50 1235,50 1300.59,115.59 U9.3 1337.43,167.75 R26.1
TCKB: U8.29 U9.4 | length 263.6
  Component Side w8: U8.29 1162.5,374.51 1162.5,305.68 1180.68,287.5 1287.5,287.5 1300.59,274.41 U9.4
TDI: P2.6 U8.30 | length 1429.9
  Component Side w8: U8.30 1183.27,316.73 v1(1185,315)
  Solder Side w8: P2.6 200,243.18 330.68,112.5 882.5,112.5 935,165 1021.82,165 1091.82,95 1210,95 1230,115 1230,270 v1(1185,315)
TDO: P2.14 U8.31 | length 1330.2
  Component Side w8: U8.31 v1(1202.95,452.95)
  Solder Side w8: P2.14 320,530 320,425.2 374.2,371 432.82,371 471.82,410 821.82,410 911.82,500 1155.91,500 v1(1202.95,452.95)
TMS: P2.8 R25.1 U9.1 | length 1328.1
  Component Side w8: P2.8 205,350 275,280 275,260 355,180 355,165 455,65 1220,65 1249.41,94.41 U9.1 1212.56,167.75 R25.1
TMSB: U8.27 U9.6 | length 230.4
  Component Side w8: U8.27 1124.21,324.17 1175.88,272.5 1235.91,272.5 1249.41,259 U9.6
TX: P2.20 U8.38 | length 1759.9
  Component Side w6: P2.20 221.8,971.8 1173.2,971.8 v1(1205,940)
  Component Side w8: U8.38 1344.37,560.63 v1(1380,525)
  Solder Side w8: v1(1205,940) 1184.78,919.78 1184.78,635.85 1170.78,621.85 1170.78,542.16 1198.82,514.13 1369.13,514.13 v1(1380,525)
VDD: C4.2 C16.2 C17.2 C18.2 C19.2 L2.2 R11.2 R20.1 R21.2 U8.4 U8.13 U8.21 U8.28 U8.37 U8.43 U8.52 U8.61 | length 1487.3
  Component Side w8: R20.1 840,290.31 975.31,290.31 1006.1,321.1 U8.21 1006.1,438.9 v1(1005,440) ; U8.13 v1(901.26,521.26) ; U8.4 v1(901.57,698.43) ; U8.61 986.42,778.58 v1(995,770) ; U8.28 v1(1143.9,431.1) ; v1(1155,770) 1163.58,778.58 U8.52 ; R21.2 v1(1194.69,129.69) ; v1(1244.06,659.06) U8.43 ; v1(1250.26,536.63) 1254.58,540.94 U8.37
  Component Side w12: R11.2 1584.84,570.47 L2.2
  Component Side w24: v1(1625,535) v1(1650,535) L2.2 ; L2.2@1675,570.47 1723.03,570.47 C4.2 v1(1725,535)
  Solder Side w8: v1(901.26,521.26) 907.28,527.28 C16.2 ; v1(995,770) 997.28,767.72 C17.2 ; C18.2 1142.72,432.28 v1(1143.9,431.1) 1143.9,180.47 v1(1194.69,129.69) ; C19.2 1152.72,767.72 v1(1155,770)
VIN0: C2A.2 R6A.1 U12.12 | length 497.1
  Component Side w8: U12.12 1727.2,387.2 1790,450 1790,707.72 C2A.2 1832.28,798.03 R6A.1
VIN1: C2B.2 R6B.1 U12.11 | length 232.5
  Component Side w8: U12.11 1743.9,361.61 C2B.2 1832.28,498.03 R6B.1
VIN2: C2C.2 R6C.1 U12.10 | length 282.5
  Component Side w8: U12.10 1748.98,336.02 1780,305 1780,250 1830,200 R6C.1 1832.28,198.03 C2C.2
VREF: C21.2 C30A.2 C30B.2 C30C.2 R1A.2 R1B.2 R1C.2 R2A.1 R2B.1 R2C.1 U1A.5 U1B.5 U1C.5 U12.7 U13.6 | length 3507.6
  Component Side w8: v1(1435,100) C21.2 1392.72,192.72 1412.8,212.8 U13.6 1502.8,212.8 1520,230 1520,320 1503.98,336.02 U12.7 ; C30C.2 2342.32,300 ; C30B.2 2340,600 2342.32,602.32 ; C30A.2 2314.65,900 v1(2342.32,872.32) U1A.5 ; U1C.5 2342.32,300 ; U1B.5 2342.32,602.32 ; R1C.2 R2C.1 ; R2B.1 R1B.2 2494.69,369.69 2465,340 2370,340 2342.32,312.32 2342.32,300 ; R2A.1 v1(2550,700) R1A.2 2494.69,669.69 2460,635 2375,635 2342.32,602.32
  Solder Side w8: v1(1435,100) v1(2550,100) v1(2550,400) v1(2550,700) 2514.65,700 v1(2342.32,872.32)
XLBR0: P2.9 U8.55 | length 1517.4
  Component Side w8: P2.9 146.47,496.47 146.47,652.37 194.1,700 225,700 250,725 250,865 v1(260,875) ; v1(1100,950) 1104.53,945.47 U8.55
  Solder Side w8: v1(260,875) 346.5,961.5 1088.5,961.5 v1(1100,950)
XLBR1: P2.5 U8.54 | length 1708.5
  Component Side w8: P2.5 140,290 140,455 185,500 220,500 275,555 275,815 v1(290,830) ; U8.54 1124.21,899.21 v1(1150,925)
  Solder Side w8: v1(290,830) 485,830 602.5,947.5 972.5,947.5 995,925 v1(1150,925)
XLBT0: P2.13 R18.2 | length 1073.5
  Component Side w8: v1(960,925) 985,950 R18.2
  Solder Side w8: P2.13 145,695 145,770 175,800 495,800 620,925 925,925 v1(960,925)
XLBT1: P2.17 R16.2 | length 967.4
  Component Side w8: P2.17 150,900 235,900 285,950 740,950 790,900 R16.2
pads on no net: P2.1 P2.12 U1A.8 U1B.8 U1C.8 U2A.1 U2A.11 U2A.16 U2B.1 U2B.11 U2B.16 U2C.1 U2C.11 U2C.16 U8.2 U8.3 U8.5 U8.7 U8.10 U8.11 U8.12 U8.14 U8.35 U8.36 U8.44 U8.45 U8.50 U8.51 U8.58 U8.59 U11.3 U11.8 U11.9 U11.10 U11.11 U13.1 U13.3 U13.5 U13.7 U13.8 U14.5 U15.5 U16.3 U16.5 U16.6 U16.7 U16.14 U16.15 U17.2 U17.3 U17.4 U17.5 U17.6 U17.7 U17.12 U17.14 U17.15 U17.16 U17.17 U17.19 U17.21 U17.22

## Polygon pours and split planes (outlines as drawn)
GND on Ground Plane (split plane): 2650,20.1 20.1,20.1 20.1,979.9 2650,979.9
VDD on Power Plane (split plane): 1269.9,725 1269.9,575 1270.29,573.05 1271.4,571.4 1273.05,570.29 1275,569.9 1744.9,569.9 1744.9,505.1 1275,505.1 1273.05,504.71 1271.4,503.6 1270.29,501.95 1269.9,500 1269.9,405.1 880.1,405.1 880.1,794.9 1269.9,794.9
5V on Power Plane (split plane): 2650,20.1 1805.1,20.1 1805.1,979.9 2650,979.9
3V3 on Power Plane (split plane): 1794.9,20.1 20.1,20.1 20.1,979.9 1794.9,979.9

## Other copper
Component Side:
  rectangle net 5V: 1810,35 1865,90
Solder Side:
  rectangle net 5V: 1810,35 1865,90
Ground Plane (plane layer: these items are gaps in the copper):
  rectangle: 2650,0 3000,1000
Power Plane (plane layer: these items are gaps in the copper):
  rectangle: 2650,0 3000,1000
  lines w10: 1800,0 1800,1000 ; 875,400 875,800 1275,800 1275,725 1275,575 1750,575 1750,500 1275,500 1275,400 875,400
Multi-Layer:
  the board outline again, w10

## Silkscreen, mask and mechanical layers (free items; w line width, h text height)
Bottom Overlay:
  text "GADDIPATI" at 555,925 h25
  text "(C) 2014 JOHNS HOPKINS UNIVERSITY" at 2840,180 h60
  text "RECEIVER V2 07222014" at 2840,80 h60

## Text inside footprints (layer, text, board x,y; h text height)
P2: Top Overlay "1" at 145,100 h20 r270; Top Overlay "2" at 235,100 h20 r270; Top Overlay "19" at 140,925 h20 r270; Top Overlay "20" at 245,930 h20 r270
U16: Bottom Overlay "Z" at 559.06,140.94 h20; Bottom Overlay "x" at 487.09,187 h20; Bottom Overlay "Y" at 515.62,224.61 h20; Bottom Overlay "X" at 438.35,145 h20
U17: Bottom Overlay "Z" at 336.05,421.33 h20 r180; Bottom Overlay "X" at 356.32,491.37 h20 r180; Bottom Overlay "Y" at 432.18,400.05 h20 r180